# Altium PCB PCB1.PcbDoc (part 1 of 2)
Units mil, origin at the board's own origin, x right, y up, seen from the top; angles counter-clockwise.
Board outline 3308.29 x 3227.82 mil, 2 copper layers (Top Layer, Bottom Layer); 105 components, 80 nets, 433 pads, 304 vias.
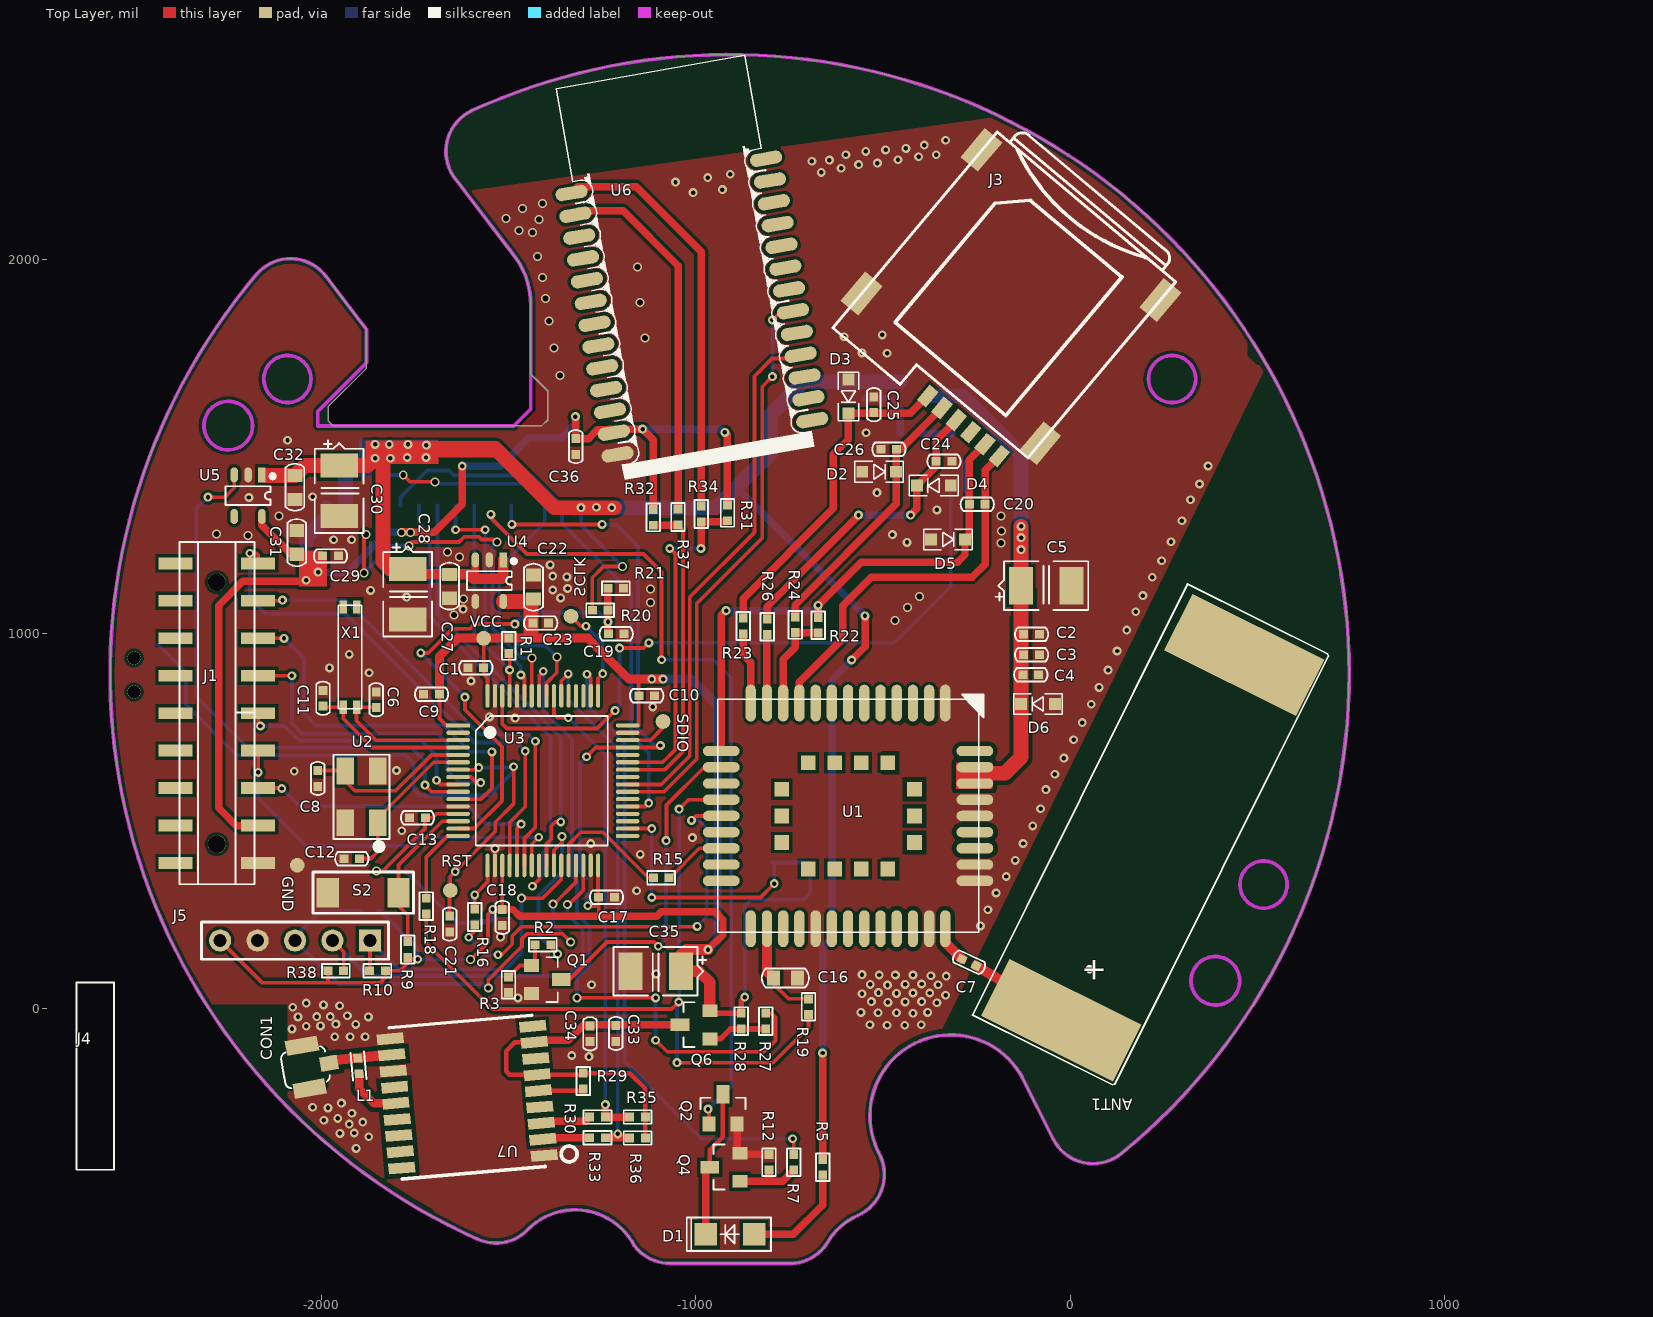
[diagram p0: Top Layer view]
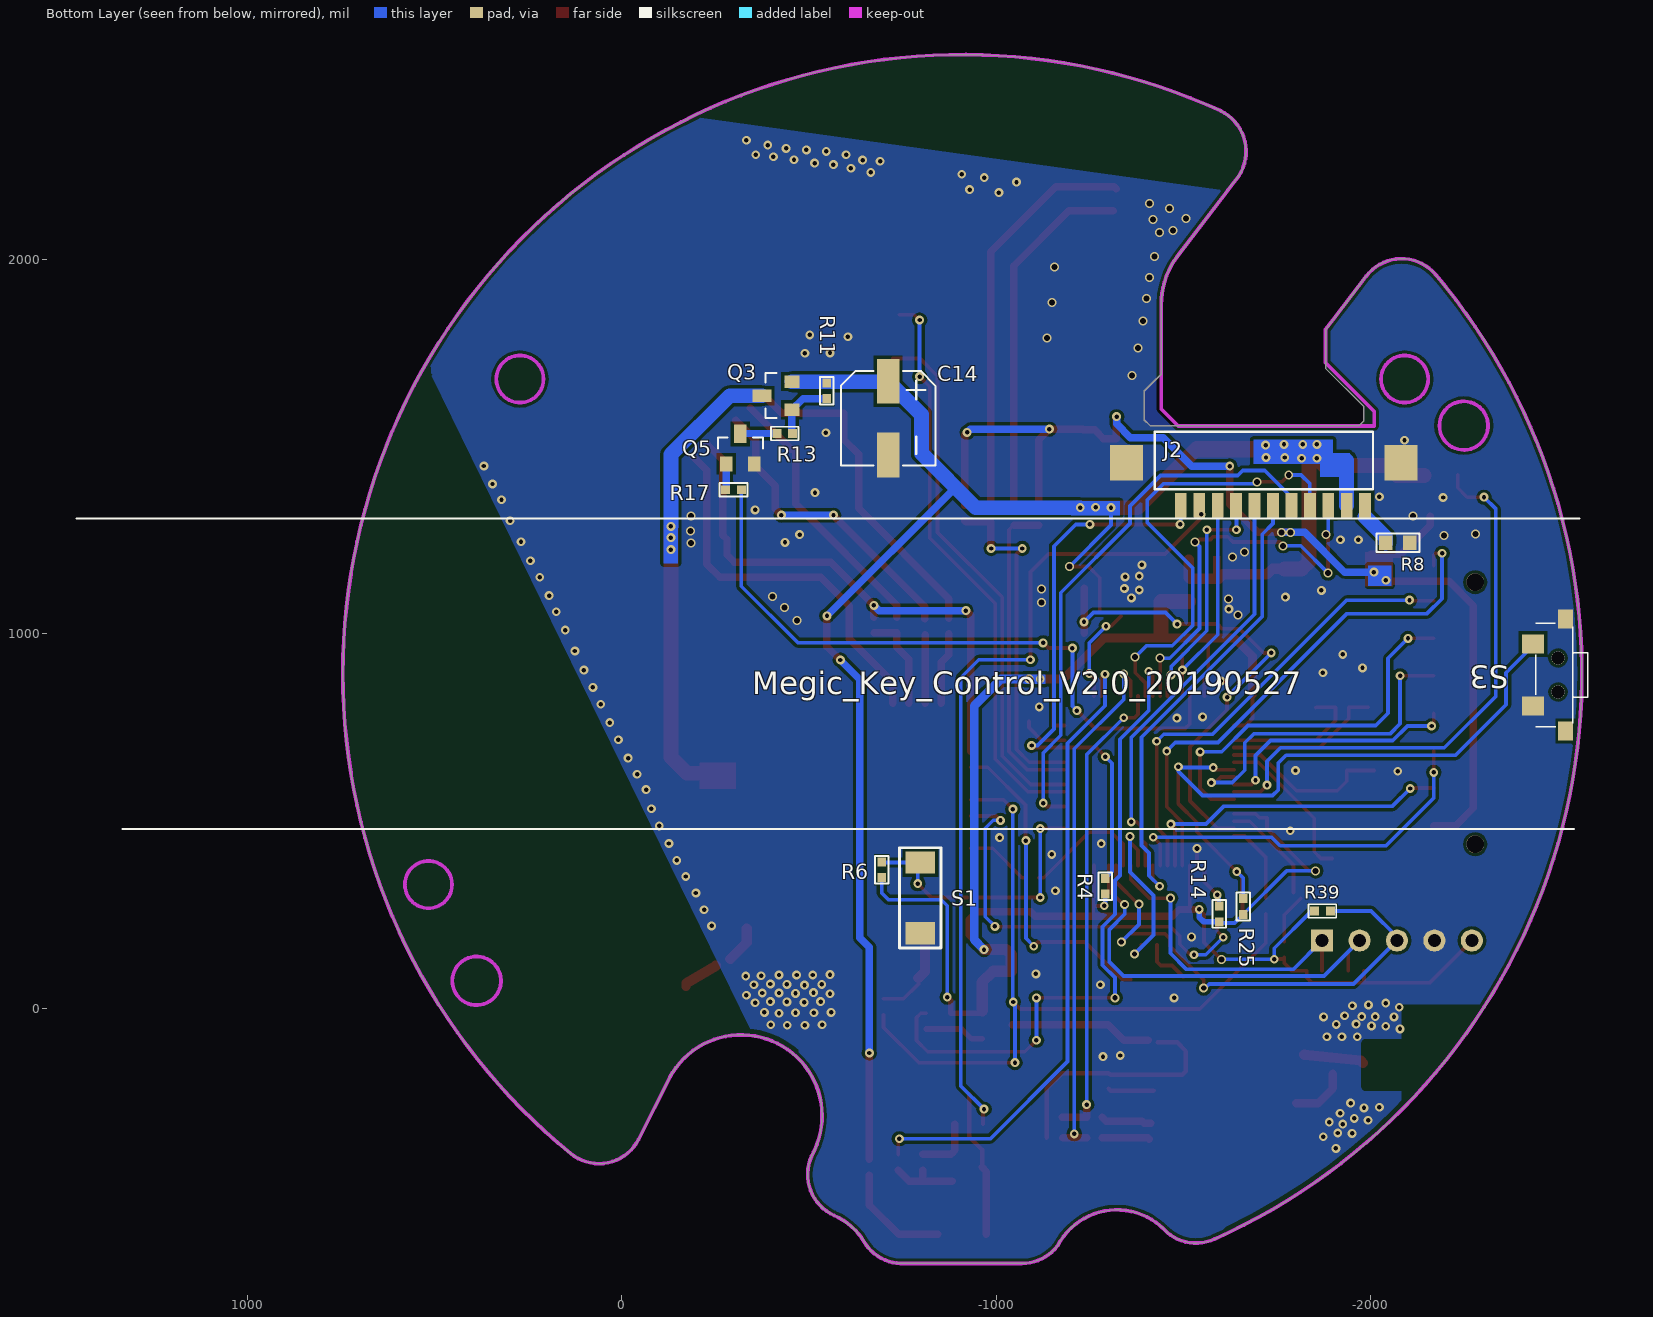
[diagram p1: Bottom Layer view, seen from below]

## Layer stack, top to bottom
Top Solder: solder mask 0.4, Solder Resist, Dk 3.5
Top Layer: signal copper 1.4
Dielectric 1: dielectric 12.6, FR-4, Dk 4.8
Bottom Layer: signal copper 1.4
Bottom Solder: solder mask 0.4, Solder Resist, Dk 3.5

## Board outline
-1981.78,1568.82 -1981.78,1606.22 -1879.42,1708.58 -1879.42,1812.91 -1899.1,1838.5 -1950.28,1905.43 -1984.14,1950.9 -1987.68,1955.63 -1987.64,1955.57 ccw(c-2081.79,1883.06) -2172.69,1959.61 -2172.6,1959.71 ccw(c-915.52,893.62) -2172.6,-172.46 -2173.33,-171.61 ccw(c-911.19,891.21) -1582.32,-616.16 -1582.13,-616.24 ccw(c-1533.15,-509.76) -1448.27,-590.59 -1448.31,-590.62 cw(c-1382.86,-650.18) -1436.48,-579.79 -1436.5,-579.8 -1426.66,-571.93 -1426.76,-572 cw(c-1322.08,-716.6) -1163.88,-633.9 -1163.83,-633.98 ccw(c-1068.12,-560.54) -1068.33,-681.18 -1068.39,-681.18 -744.57,-681.18 -744.5,-681.18 ccw(c-748.17,-564.35) -647.05,-622.97 -647.13,-623.1 cw(c-495.55,-715.62) -567.5,-553.27 -567.33,-553.2 ccw(c-616.59,-443.6) -512.32,-383.88 -512.29,-383.94 -518.19,-371.14 -521.15,-363.27 -521.12,-363.35 cw(c-318.62,-287.23) -128.5,-184.01 -128.43,-184.13 -44.77,-350.47 -44.82,-350.38 ccw(c60.99,-295.54) 136.31,-387.89 136.02,-388.13 ccw(c-909.34,893.62) 136.02,2175.37 ccw(c-909.59,888.75) -1599.74,2396.19 -1598.95,2396.55 ccw(c-1546.53,2288.12) -1633.31,2204.6 -1633.35,2204.65 -1622.53,2189.88 -1618.59,2184.96 -1484.67,2009.32 -1484.61,2009.25 cw(c-1656.39,1878.38) -1440.44,1878.38 -1440.44,1692.83 -1395.16,1647.56 -1395.16,1571.77 -1411.9,1555.04 -1968,1555.04

## Design rules (kind name [scope] priority, off if disabled: settings)
Clearance [All] p1: gap=8
ComponentClearance [All] p1 off: gap=10 collisioncheckmode=3 verticalgap=10 showdistances=FALSE
Height [All] p1 off: minheight=0 maxheight=1000 prefheight=500
HoleToHoleClearance [All] p1 off: gap=10 allowstackedmicrovias=TRUE
MinimumSolderMaskSliver [All] p1 off: minsoldermaskwidth=10
NetAntennae [All] p1 off: netantennaetolerance=0
PlaneConnect [All] p1: planeconnectstyle=Direct reliefexpansion=20 reliefentries=4 reliefconductorwidth=10 reliefairgap=10
PolygonConnect [All] p1: connectstyle=Direct reliefconductorwidth=10 reliefentries=4 polygonreliefangle="90 Angle" airgapwidth=10
RoutingVias [All] p1: holewidth=28 width=50 viastyle="Through Hole" minholewidth=28 minwidth=50 maxholewidth=28 maxwidth=50
SilkToSilkClearance [All] p1 off: silktosilkclearance=10
SilkToSolderMaskClearance [IsPad] p1 off: minsilkscreentomaskgap=10 clearancetoexposedcopper=TRUE
SolderMaskExpansion [All] p1: expansion=4
Width [All] p1: maxlimit=100 minlimit=1 preferedwidth=10 minimp=50.000000 maximp=50.000000 favimp=50.000000
22 further rules are at their usual default settings.

## Components (designator, comment, footprint, x,y, rotation, side; value= is the part's Value field where it differs from the comment)
ANT1 "PAD" L4G3210 -24,-32 r63.5 top
C1 "0.1uF" C0402 -1587.32,909.79 r180 top
C2 "0.1uF" C0402 -103.32,998.87 r180 top
C3 "100pF" C0402 -103.32,943.87 r180 top
C4 "22pF" C0402 -105.32,890.87 r180 top
C5 "220uF/6.3V" C1210-E -64.32,1128.87 r0 top
C6 "20pF" C0402 -1853.32,823.87 r270 top
C7 "100pF" C0402 -270.32,122.79 r155 top
C8 "20pF" C0402 -2009.32,613.79 r270 top
C9 "0.1uF" C0402 -1705.32,838.79 r180 top
C10 "0.1uF" C0402 -1131,835 r0 top
C11 "20pF" C0402 -1995.32,827.87 r270 top
C12 "20pF" C0402 -1918.32,399.79 r180 top
C13 "0.1uF" C0402 -1743,509 r180 top
C14 "330uF/6.3V" CAP6R3X5R6-SM -711.32,1575.87 r270 bottom
C16 "4.7uF" C0603 -728.32,80.87 r180 top
C17 "0.1uF" C0402 -1238.28,296.91 r0 top
C18 "0.1uF" C0402 -1516.32,242.79 r270 top
C19 "2uF" C0402 -1212.32,999.87 r0 top
C20 "0.1uF" C0402 -248.32,1345.87 r180 top
C21 "1uF" C0402 -1657.28,224.91 r270 top
C22 "10uF" C0603 -1433.28,1156.91 r270 top
C23 "0.1uF" C0402 -1414,1029 r180 top
C24 "22pF" C0402 -337.32,1460.87 r180 top
C25 "22pF" C0402 -524.32,1611.87 r270 top
C26 "22pF" C0402 -484.32,1492.87 r0 top
C27 "2.2uF" C0603 -1657.32,1094.87 r90 top
C28 "220uF/6.3V" C1210-E -1769.32,1105.79 r270 top
C29 "0.1uF" C0402 -1975.28,1207.91 r180 top
C30 "220uF/6.3V" C1210-E -1952.32,1381.79 r270 top
C31 "10uF" C0603 -2065.28,1275.91 r270 top
C32 "2.2uF" C0603 -2070.32,1358.87 r90 top
C33 "22pF" C0402 -1213.32,-67.13 r270 top
C34 "1uF" C0402 -1282.32,-68.13 r90 top
C35 "220uF/6.3V" C1210-E -1107.32,98.79 r180 top
C36 "0.1uF" C0402 -1320.32,1499.87 r270 top
CON1 "SMA/UFLR" IPX_U.FL -2041.32,-157.21 r10 top
D1 "LED/0603" D1206 -908.84,-603.43 r180 top
D2 "ESDLC5V0D3" SOD-323 -510.32,1432.87 r0 top
D3 "ESDLC5V0D3" SOD-323 -592.32,1633.87 r270 top
D4 "ESDLC5V0D3" SOD-323 -364.32,1395.87 r180 top
D5 "ESDLC5V0D3" SOD-323 -326.32,1251.87 r0 top
D6 "ESDLC5V0D3" SOD-323 -86.32,812.87 r180 top
J1 "CON2X9" OLED_2X9SMT -2228.64,788.07 r90 top
J2 "CON12" CON_12WT -1714.32,1342.79 r0 bottom
J3 "MICRO_SIM" MICRO_SIM -80.32,1508.79 r50 top
J4 "CON5" SIP1X5-2R54 -2603.28,-331.09 r90 top
J5 "CON5" HDR1X5 -1870,181 r180 top
L1 "47nH" L0402 -1902.32,-134.13 r275 top
Q1 "S8050" SOT23 -1399,77 r270 top
Q2 "S8050" SOT23 -927.32,-269.21 r0 top
Q3 "SI2305" SOT23 -414.32,1635.87 r90 bottom
Q4 "S0805" SOT23 -922.32,-424.21 r90 top
Q5 "S8050" SOT23 -316.32,1493.87 r180 bottom
Q6 "SI2305" SOT23 -1002.32,-44.21 r90 top
R1 "10K" R0402 -1499.32,987.87 r270 top
R2 "4.7K" R0402 -1388,170 r180 top
R3 "47K" R0402 -1500,83 r270 top
R4 "100K" R0402 -1291.32,305.87 r90 bottom
R5 "330R" R0402 -661.32,-404.21 r270 top
R6 "270K" R0402 -694.32,389.87 r270 bottom
R7 "4.7K" R0402 -738.32,-391.21 r270 top
R8 "0R" R0603 -2040,1243 r180 bottom
R9 "270K" R0402 -1769,177 r270 top
R10 "22K" R0402 -1870,100 r0 top
R11 "100K" R0402 -547.32,1668.87 r270 bottom
R12 "47K" R0402 -804.32,-431.21 r90 top
R13 "10K" R0402 -415.32,1534.87 r180 bottom
R14 "22K" R0402 -1595,232 r90 bottom
R15 "1K" R0402 -1112.32,348.87 r0 top
R16 "1K" R0402 -1590.32,263.87 r270 top
R17 "1K" R0402 -278.32,1384.87 r180 bottom
R18 "1K" R0402 -1719.28,292.91 r270 top
R19 "2M" R0402 -699,24 r270 top
R20 "2M" R0402 -1275.32,1062.87 r0 top
R21 "1M" R0402 -1233.32,1121.87 r0 top
R22 "10K" R0402 -673.32,1042.87 r270 top
R23 "22R" R0402 -873.32,1040.87 r270 top
R24 "22R" R0402 -734.32,1043.87 r270 top
R25 "10k" R0402 -1659.28,251.91 r90 bottom
R26 "22R" R0402 -809.32,1038.87 r270 top
R27 "10K" R0402 -813.32,-14.13 r270 top
R28 "100K" R0402 -878.32,-14.13 r270 top
R29 "1K" R0402 -1300.32,-214.13 r90 top
R30 "22R" R0402 -1282.32,-290.21 r0 top
R31 "22K" R0402 -915.32,1342.87 r270 top
R32 "22K" R0402 -1113.32,1330.87 r270 top
R33 "22R" R0402 -1282.32,-345.21 r0 top
R34 "22R" R0402 -985.32,1299.87 r90 top
R35 "22K" R0402 -1135.32,-290.21 r180 top
R36 "22K" R0402 -1135.32,-346.21 r180 top
R37 "22R" R0402 -1047.32,1291.87 r90 top
R38 "22K" R0402 -1941,100 r180 top
R39 "22K" R0402 -1891,260 r0 bottom
S1 "XXW-2548" XXW-2548 -797.32,294.87 r270 bottom
S2 "XXW-2548" XXW-2548 -1888,309 r180 top
S3 "SW_3X6X5" SW3X6X3R5 -2500,890 r90 bottom
U1 "BC28" BC28 -593.32,513.79 r270 top
U2 "8.000MHz" XTAL4-5X3R2 -1892.32,564.79 r90 top
U3 "STM32L071RBT6" QFP64-0R5 -1408.32,607.79 r270 top
U4 "TPS78233DDCR" SOT23-5 -1551.28,1141.91 r180 top
U5 "XC6209B332MR" SOT23-5 -2195.32,1368.87 r180 top
U6 "HC-42" BLEMODE -1010.32,1873.79 r100 top
U7 "ATGM336H-5N" ATGM336 -1437.32,-22.21 r185 top
X1 "32.768KHz" X_MC146 -1923.32,937.87 r90 top

## Footprints (in the part's own frame and the unit in brackets; to place one, negate y for a bottom-side part, rotate by r counter-clockwise, add the part's x,y. Pads: shape width x height; smd on the part's side, far side on the other; paste and mask are expansions set on the pad)
ATGM336 [mm]
  rect 1.8x0.75 smd: 1(0,9.45) 2(0,8.35) 3(0,7.25) 4(0,6.15) 5(0,5.05) 6(0,3.95) 7(0,2.85) 8(0,1.75) 9(0,0.65) 10(9.7,0.65) 11(9.7,1.75) 12(9.7,2.85) 13(9.7,3.95) 14(9.7,5.05) 15(9.7,6.15) 16(9.7,7.25) 17(9.7,8.35) 18(9.7,9.45)
  silkscreen extent -2.24,-0.1 9.7,10.2
BC28 [mm]
  oval 2.5x0.7 smd mask+0.05: 1(-7.65,6.6) 2(-7.65,5.5) 3(-7.65,4.4) 4(-7.65,3.3) 5(-7.65,2.2) 6(-7.65,1.1) 7(-7.65,0) 8(-7.65,-1.1) 9(-7.65,-2.2) 10(-7.65,-3.3) 11(-7.65,-4.4) 12(-7.65,-5.5) 13(-7.65,-6.6) 23(7.65,-6.6) 24(7.65,-5.5) 25(7.65,-4.4) 26(7.65,-3.3) 27(7.65,-2.2) 28(7.65,-1.1) 29(7.65,0) 30(7.65,1.1) 31(7.65,2.2) 32(7.65,3.3) 33(7.65,4.4) 34(7.65,5.5) 35(7.65,6.6)
  oval 0.7x2.5 smd mask+0.05: 14(-4.4,-8.6) 15(-3.3,-8.6) 16(-2.2,-8.6) 17(-1.1,-8.6) 18(0,-8.6) 19(1.1,-8.6) 20(2.2,-8.6) 21(3.3,-8.6) 22(4.4,-8.6) 36(4.4,8.6) 37(3.3,8.6) 38(2.2,8.6) 39(1.1,8.6) 40(0,8.6) 41(-1.1,8.6) 42(-2.2,8.6) 43(-3.3,8.6) 44(-4.4,8.6)
  rect 1x1 smd mask+0.05: 45(-3.6,2.7) 46(-3.6,0.9) 47(-3.6,-0.9) 48(-3.6,-2.7) 49(-1.8,-4.5) 50(0,-4.5) 51(1.8,-4.5) 52(3.6,-2.7) 53(3.6,-0.9) 54(3.6,0.9) 55(3.6,2.7) 56(1.8,4.5) 57(0,4.5) 58(-1.8,4.5)
  silkscreen extent -8.25,-8.85 7.9,9.2
BLEMODE [mm]
  oval 0.9x2.2 smd: 1(9,6.7) 2(7.5,6.7) 3(6,6.7) 4(4.5,6.7) 5(3,6.7) 6(1.5,6.7) 7(0,6.7) 8(-1.5,6.7) 9(-3,6.7) 10(-4.5,6.7) 11(-6,6.7) 12(-7.5,6.7) 13(-9,6.7) 14(-9,-6.7) 15(-7.5,-6.7) 16(-6,-6.7) 17(-4.5,-6.7) 18(-3,-6.7) 19(-1.5,-6.7) 20(0,-6.7) 21(1.5,-6.7) 22(3,-6.7) 23(4.5,-6.7) 24(6,-6.7) 25(7.5,-6.7) 26(9,-6.7)
  silkscreen extent -10.75,-6.5 16.15,6.5
C0402 [mil]
  rect 24x23 smd: 1(-21,0) 2(21,0)
  silkscreen extent -44,-18 44,18
C0603 [mm]
  rect 0.9x1 smd: 1(0,0) 2(1.62,0)
  silkscreen extent -0.77,-0.64 2.42,0.64
C1210-E [mil]
  rect 64x100 smd: 1(-67.5,0) 2(67.5,0)
  silkscreen extent -135,-65 112,65
CAP6R3X5R6-SM [mil]
  rect 120x60 smd: 1(-98.43,0) 2(98.43,0)
  silkscreen extent -126,-126 126,126
CON_12WT [mm]
  rect 0.8x1.7 smd: 1(-6.875,0) 2(-5.625,0) 3(-4.375,0) 4(-3.125,0) 5(-1.875,0) 6(-0.625,0) 7(0.625,0) 8(1.875,0) 9(3.125,0) 10(4.375,0) 11(5.625,0)
  rect 0.8x1.7 on Bottom Overlay: 12(6.875,0)
  rect 2.25x2.4 smd: 13(9.3,-2.9) 14(-9.3,-2.9)
  silkscreen extent -7.4,-5 7.4,-1.1
D1206 [mil]
  rect 60x60 smd: 1(-65,0) 2(65,0)
  silkscreen extent -110,-45 115,45
HDR1X5 [mm] "Connector; Header; 5 Position"
  rect 1.5x1.5 hole 0.9: 1(0,0)
  round 1.5 hole 0.9: 2(2.54,0) 3(5.08,0) 4(7.62,0) 5(10.16,0)
  silkscreen extent -1.27,-1.27 11.43,1.27
IPX_U.FL [mm]
  rect 1.2x1 smd: 1(1.6,0)
  rect 2.2x1.05 smd: 2(0,-1.475) 3(0,1.475)
  silkscreen extent -1.55,-1.24 1.51,1.23
L4G3210 [mm]
  rect 4.3x10 smd: 0(27.711,-0.051) 1(0,0)
  silkscreen extent -2.36,-5.18 30.3,5.54
L0402 [mil]
  rect 24x23 smd: 1(-1,0) 2(41,0)
  silkscreen extent -17,-18 57,18
MICRO_SIM [mm]
  rect 2.6x1.55 smd: 1(0,0) 2(0,15.8) 7(12.68,0) 8(12.68,15.85)
  rect 1.35x0.8 smd: C1(-2.45,2.83) C2(-2.45,5.37) C3(-2.45,7.91) C5(-2.45,1.56) C6(-2.45,4.1) C7(-2.45,6.64)
  silkscreen extent -3.05,0 15.51,15.8
OLED_2X9SMT [mm]
  rect 0.8x2.3 smd: 1(-10.16,-1.53) 2(-10.16,4.07) 3(-7.62,-1.53) 4(-7.62,4.07) 5(-5.08,-1.53) 6(-5.08,4.07) 7(-2.54,-1.53) 8(-2.54,4.07) 9(0,-1.53) 10(0,4.07) 11(2.54,-1.53) 12(2.54,4.07) 13(5.08,-1.53) 14(5.08,4.07) 15(7.62,-1.53) 16(7.62,4.07) 17(10.16,-1.53) 18(10.16,4.07)
  round 1.2 hole 1.2 unplated: 19(-8.89,1.27) 20(8.89,1.27)
  silkscreen extent -11.6,-1.27 11.6,3.81
QFP64-0R5 [mm]
  rect 0.28x1.6 smd: 1(-3.75,-5.75)
  oval 0.28x1.6 smd: 2(-3.25,-5.75) 3(-2.75,-5.75) 4(-2.25,-5.75) 5(-1.75,-5.75) 6(-1.25,-5.75) 7(-0.75,-5.75) 8(-0.25,-5.75) 9(0.25,-5.75) 10(0.75,-5.75) 11(1.25,-5.75) 12(1.75,-5.75) 13(2.25,-5.75) 14(2.75,-5.75) 15(3.25,-5.75) 16(3.75,-5.75) 33(3.75,5.75) 34(3.25,5.75) 35(2.75,5.75) 36(2.25,5.75) 37(1.75,5.75) 38(1.25,5.75) 39(0.75,5.75) 40(0.25,5.75) 41(-0.25,5.75) 42(-0.75,5.75) 43(-1.25,5.75) 44(-1.75,5.75) 45(-2.25,5.75) 46(-2.75,5.75) 47(-3.25,5.75) 48(-3.75,5.75)
  oval 1.6x0.28 smd: 17(5.75,-3.75) 18(5.75,-3.25) 19(5.75,-2.75) 20(5.75,-2.25) 21(5.75,-1.75) 22(5.75,-1.25) 23(5.75,-0.75) 24(5.75,-0.25) 25(5.75,0.25) 26(5.75,0.75) 27(5.75,1.25) 28(5.75,1.75) 29(5.75,2.25) 30(5.75,2.75) 31(5.75,3.25) 32(5.75,3.75) 49(-5.75,3.75) 50(-5.75,3.25) 51(-5.75,2.75) 52(-5.75,2.25) 53(-5.75,1.75) 54(-5.75,1.25) 55(-5.75,0.75) 56(-5.75,0.25) 57(-5.75,-0.25) 58(-5.75,-0.75) 59(-5.75,-1.25) 60(-5.75,-1.75) 61(-5.75,-2.25) 62(-5.75,-2.75) 63(-5.75,-3.25) 64(-5.75,-3.75)
  silkscreen extent -4.4,-4.55 4.4,4.4
R0402 [mil]
  rect 24x23 smd: 1(-1,0) 2(41,0)
  silkscreen extent -17,-18 57,18
R0603 [mm]
  rect 0.9x1 smd: 1(0,0) 2(1.62,0)
  silkscreen extent -0.64,-0.64 2.29,0.64
SIP1X5-2R54 [mm]
  round 1 smd: 1(18.112,-13.698) 2(16.408,-24.079) 3(33.501,-26.339) 4(27.864,-38.506) 5(35.003,-32.265)
  silkscreen extent -2.54,-1.27 10.16,1.27
SOD-323 [mm]
  rrect0% 0.8x0.8 smd: 1(-1.15,0) 2(1.15,0)
  silkscreen extent -1.65,-0.7 1.65,0.7
SOT23 [mil]
  rect 34x40 smd: 1(-37.5,-40) 2(37.5,-40)
  rect 34x50 smd: 3(0,40)
  silkscreen extent -60,0 61,31
SOT23-5 [mil]
  rect 20x40 smd: 1(-37,-55.5)
  oval 20x40 smd: 2(0,-55.5) 3(37,-55.5) 4(37,55.5) 5(-37,55.5)
  silkscreen extent -74,-60 60,25
SW3X6X3R5 [mm]
  rect 1.3x1.5 smd: 1(-2.1,1.7) 2(2.1,1.7)
  rect 1.3x1 smd: 3(3.8,-0.5) 4(-3.8,-0.5)
  round 0.9 hole 0.9 unplated: 5(-1.15,0) 6(1.15,0)
  silkscreen extent -3.5,-2 3.52,1.51
X_MC146 [mm]
  rect 0.9x0.5 smd: 1(-3.4,0.45) 2(-3.4,-0.45) 3(3.4,0.45) 4(3.4,-0.45)
  silkscreen extent -3.5,-0.8 3.5,0.8
XTAL4-5X3R2 [mm]
  rect 1.8x1.2 smd: 1(-1.75,-1.1) 2(1.75,-1.1) 3(1.75,1.1) 4(-1.75,1.1)
  silkscreen extent -3.69,-1.9 2.85,1.9
XXW-2548 [mm]
  rect 1.5x2 smd: 1(-2.4,0) 2(2.4,0)
  silkscreen extent -3.4,-1.4 3.4,1.4

## Part data
C1 C2 C3 C4 C5 C6 C7 C8 C9 C10 C11 C12 C13 C14 C16 C17 C18 C19 C20 C21 C22 C23 C24 C25 C26 C27 C28 C29 C30 C31 C32 C33 C34 C35 C36: library part C
D2 D3 D4 D5 D6: library part TVS_0, "TVS  Vrwm=5V Vc=9.8V 2P SOD323 SMT"
L1: library part L
Q1 Q2 Q4 Q5: library part NPN-A
Q3 Q6: library part FDN338P
R1 R2 R3 R4 R5 R6 R7 R8 R9 R10 R11 R12 R13 R14 R15 R16 R17 R18 R19 R20 R21 R22 R23 R24 R25 R26 R27 R28 R29 R30 R31 R32 R33 R34 R35 R36 R37 R38 R39: library part R
U2: library part XTAL_3.2X2.5
U5: library part LP2980
X1: library part CRYSTAL2

## Via types
v1: diameter 23.62, hole 11.81, Top Layer to Bottom Layer, 251 vias
v2: diameter 24, hole 16, Top Layer to Bottom Layer, 43 vias
v3: diameter 24, hole 14, Top Layer to Bottom Layer, 10 vias

## Nets (pads, with @x,y where several pads share a name; then routed paths per layer and width w, separated by ;. In a path a pad name is that pad's centre, name@x,y a point inside that pad or via, vN(x,y) a via of type N, cw(c..) or ccw(c..) an arc to the next point about the centre after c; other vN are vias at no path point)
BAT_VOLT_DET: C19.1 R20.2 R21.1 U3.15 | length 1309.1
  Top Layer w10: v1(-1734.28,948.91) -1714.09,948.91 -1649.32,1013.68 -1603,1013.68 -1590.68,1026 v1(-1483,1026) ; U3.15@-1634.7,479.83 -1591.35,479.83 -1517.28,553.91 -1517.28,698.28 -1616.28,797.28 v1(-1616.28,830.91)
  Top Layer w20: C19.1@-1234.32,1000.87 v1(-1234.32,1031.87) R20.2@-1234.32,1062.87 R21.1@-1234.32,1121.87
  Bottom Layer w10: v1(-1734.28,948.91) v1(-1616.28,830.91) ; v1(-1483,1026) -1452,1057 -1259.45,1057 v1(-1234.32,1031.87)
BI: J2.6 U3.24 | length 1245.4
  Top Layer w10: v1(-1436.32,325.87) -1418.16,344.03 U3.24@-1418.16,381.41
  Bottom Layer w10: J2.6@-1738.93,1342.79 -1738.93,1294.56 -1710.32,1265.96 -1710.32,1045.87 -1388,723.55 -1388,435 -1408,415 -1408,354.19 v1(-1436.32,325.87)
BLE_LINK: U3.40 U6.17 | length 1421.1
  Top Layer w10: U3.40@-1181.94,597.94 -1092.24,597.94 -1016.28,673.91 -1016.28,1097.91 -843.32,1270.87 -843.32,1687.87 -796.13,1735.06 U6.17@-724.45,1735.06
BLE_LPIN: U3.39 U6.19 | length 1536.9
  Top Layer w10: U3.39@-1181.94,578.26 -1084.93,578.26 -997.28,665.91 -997.28,1080.91 -822.32,1255.87 -822.32,1659.87 v1(-795.32,1686.87) ; v1(-795.32,1837.87) -781.17,1852.02 U6.19@-740.89,1852.02
  Bottom Layer w10: v1(-795.32,1686.87) v1(-795.32,1837.87)
BLE_UART1_RX: R31.2 R34.1 U3.43 | length 909.1
  Top Layer w10: U3.43@-1181.94,657 -1088.19,657 -1054.28,690.91 -1054.28,1212.82 v1(-1069.32,1227.87)
  Top Layer w20: v1@-985.32,1228.87 R34.1@-985.32,1298.87 -918.32,1298.87 R31.2@-915.32,1301.87
  Bottom Layer w10: v1(-1069.32,1227.87) v1(-986.32,1227.87)
BLE_UART1_TX: R32.2 R37.1 U3.42 | length 843.4
  Top Layer w10: U3.42@-1181.94,637.31 -1082.42,637.31 -1034.28,685.46 -1034.28,1277.82 R37.1@-1047.32,1290.87
  Top Layer w20: R32.2@-1113.32,1289.87 R37.1@-1048.32,1289.87
CHANGE_SEAL_PB4: J2.4 U3.56 | length 1218.6
  Top Layer w10: v2(-1781,1424) -1763,1406 v2(-1696,1406) ; U3.56@-1398.48,834.17 -1398.48,868.52 -1371,896 v2(-1371,938)
  Bottom Layer w10: J2.4@-1837.35,1342.79 -1837.35,1400.65 -1814,1424 v2(-1781,1424) ; v2(-1696,1406) -1691,1401 -1447,1401 -1403,1357 -1403,1297 -1525,1175 -1525,1023 -1470,968 -1401,968 v2(-1371,938)
CHARGE_DET: J2.8 U3.59 | length 631.4
  Top Layer w10: v1(-1641.32,1277.87) v1(-1562.32,1277.87) ; v1(-1467,890) -1457.53,880.53 U3.59@-1457.53,834.17
  Bottom Layer w10: v1(-1641.32,1277.87) -1641.32,1341.97 J2.8@-1640.5,1342.79 ; v1(-1562.32,1277.87) -1562.32,1008.32 -1467,913 v1(-1467,890)
CHARGE_EMPTY: J2.9 R1.2 U3.61 | length 592.3
  Top Layer w10: R1.2@-1499.32,946.87 -1496.9,944.45 v1(-1496.9,903.29) U3.61@-1496.9,834.17
  Bottom Layer w10: J2.9@-1591.29,1342.79 -1591.29,997.67 v1(-1496.9,903.29)
CHARGE_LED: J2.10 Q2.1 | length 2184.1
  Top Layer w10: v1(-1547,1319) -1547,1309 -1450.81,1212.81 -1139.26,1212.81 -1091.32,1164.87 v1(-1091.32,930.87) ; v1(-967.32,-269.13) -964.82,-271.63 Q2.1@-964.82,-309.21
  Bottom Layer w10: v1(-1091.32,930.87) -953.23,930.87 -905.28,882.91 -905.28,-207.09 v1(-967.32,-269.13)
CS1: J1.13 U3.11 | length 1035.3
  Top Layer w10: J1.13@-2168.4,988.07 -2099.52,988.07 v1(-2099.32,987.87) ; U3.11@-1634.7,558.57 -1573.61,558.57 -1544.32,587.87 v1(-1544.32,684.87)
  Bottom Layer w10: v1(-2099.32,987.87) -2046.32,934.87 -2046.32,787.87 -2013.32,754.87 -1672.32,754.87 -1602.32,684.87 v1(-1544.32,684.87)
CS2: J1.17 U3.20 | length 1400.2
  Top Layer w10: v1(-2190.32,1214.96) -2172.32,1214.96 -2168.4,1211.04 J1.17@-2168.4,1188.07 J1.17@-2168.4,1181.79 ; U3.20@-1496.9,381.41 -1496.9,496.37 -1455.28,538 v1(-1455.28,686.91)
  Bottom Layer w10: v1(-2190.32,1214.96) -2190.32,1093.87 -2150.32,1053.87 -1936.32,1053.87 -1592.13,709.68 -1478.04,709.68 v1(-1455.28,686.91)
D/C: J1.11 U3.8 | length 896.4
  Top Layer w10: J1.11@-2168.4,888.07 -2078.52,888.07 v1(-2078.32,887.87) ; U3.8@-1634.7,617.63 -1600.08,617.63 -1585.32,602.87 v1(-1574.32,602.87)
  Bottom Layer w10: v1(-2078.32,887.87) -2078.32,759.87 -2051.32,732.87 -1687.32,732.87 -1663.32,708.87 -1663.32,635.87 -1630.32,602.87 v1(-1574.32,602.87)
DS1302_CLK: J5.3 R39.1 U3.29 | length 1342.5
  Top Layer w10: v3(-1554,54) -1554,76 -1464,166 -1464,185.91 -1450.91,199 -1356,199 v3(-1334,177) ; v3(-1381,278) -1379,278 -1319.74,337.26 U3.29@-1319.74,381.41
  Bottom Layer w10: R39.1@-1892,260 -2001,260 -2070,191 J5.3@-2070,181 -1954,65 -1569,65 v3@-1560,56 ; v3(-1381,278) -1381,224 v3(-1334,177)
DS1302_IO: J5.2 R38.1 U3.30 | length 1111
  Top Layer w10: J5.2@-1970,181 -1940,151 R38.1@-1940,100 ; v3(-1343,277) -1339,277 -1300.05,315.95 U3.30@-1300.05,381.41
  Bottom Layer w10: J5.2@-1970,181 -1875,86 -1340,86 -1302,124 -1302,210.54 -1343,251.54 v3(-1343,277)
DS1302_RST: J5.1 R10.1 U3.27 | length 826.8
  Top Layer w10: R10.1@-1870,100 J5.1@-1870,161 ; v3(-1465,294) -1409,294 -1359.11,343.89 U3.27@-1359.11,381.41
  Bottom Layer w10: J5.1@-1870,181 -1793,104 -1508,104 -1465,147 v3(-1465,294)
ELECTRIC_LIMIT_PB6: J2.3 U3.58 | length 1059.4
  Top Layer w10: v2(-1886,1162) v2@-1886,1266 ; v2(-1766,1235) -1756,1245 -1632,1245 -1618,1259 -1579,1259 -1572,1252 -1542,1252 -1535,1245 v2(-1531,1245) ; U3.58@-1437.85,834.17 v2(-1437.85,934.85)
  Bottom Layer w10: J2.3@-1886.56,1342.79 -1886.56,1270.56 v2(-1881,1265) ; v2(-1886,1162) -1813,1235 v2(-1766,1235) ; v2(-1531,1245) -1543,1233 -1543,1014.46 -1463.39,934.85 v2(-1437.85,934.85)
FI: J2.7 U3.25 | length 1122.3
  Top Layer w10: U3.25@-1398.48,381.41 -1398.48,438.88 -1386,451.36 -1386,487 -1375.13,497.87 v1(-1360.32,497.87)
  Bottom Layer w10: J2.7@-1689.71,1342.79 -1689.71,1052.26 -1360.32,722.87 v1(-1360.32,497.87)
FSO/SPI1_MISO: J1.15 U3.22 | length 1238.1
  Top Layer w10: J1.15@-2168.4,1088.07 v1@-2105.12,1088.07 ; U3.22@-1457.53,381.41 -1457.53,453.74 -1428.28,483 v1(-1428.28,712.91)
  Bottom Layer w10: v1(-2103.32,1089.87) -1935.32,1089.87 -1577.32,731.87 -1447.23,731.87 v1(-1428.28,712.91)
GND: C1.2 C2.1 C3.1 C4.1 C5.2 C6.1 C8.2 C9.2 C10.2 C11.1 C12.2 C13.2 C14.2 C16.1 C17.2 C18.2 C19.2 C21.2 C22.1 C23.1 C24.1 C25.1 C26.1 C27.1 C28.2 C29.1 C30.2 C31.1 C32.1 C33.2 C34.1 C35.2 C36.2 CON1.2 CON1.3 D2.1 D3.1 D4.1 D5.1 D6.1 J1.1 J2.13 J2.14 J3.1 J3.2 J3.7 J3.8 J4.1 J5.4 Q1.2 Q2.2 Q4.2 Q5.2 R3.2 R8.2 R12.2 R21.2 S1.2 S2.2 S3.1 S3.3 U1.1 U1.27 U1.34 U1.36 U1.37 U1.40 U1.41 U2.2 U2.4 U3.12 U3.18 U3.31 U3.47 U3.60 U3.63 U4.2 U4.4 U5.2 U6.13 U7.1 U7.10 U7.12 | length 205.8
  Top Layer w10: U3.18@-1536.27,381.41 -1536.27,426.73 v3(-1536,427)
  Top Layer w20: Q2.2@-889.82,-309.21 -889.82,-379.21 Q4.2@-882.32,-386.71 -878.82,-390.21 R12.2@-804.32,-390.21
  other v1: -1907,-374 -1873,-343 -1950,-334 -1912,-333 -1925,-309 -1889,-304 -1993,-299 -1956,-294 -1918,-280 -1982,-266 -2023,-264 -1946,-253 -1285,-129 -1331,-126 -1964,-76 -1923,-76 -1883,-76 -2078,-55 -2040,-48 -2002,-47 -489,-45 -442,-45 -535,-44 -398,-44 -1908,-43 -1961,-42 -2062,-23 -1874,-23 -2012,-22 -1976,-22 -1930,-20 -420,-13 -513,-12 -464,-12 -559,-11 -381,-11 -2076,3 -1951,7 -1994,9 -2040,14 -356,15 -487,16 -441,17 -531,18 -397,18 -1475,28 -333,35 -556,39 -464,40 -420,41 -375,41 -512,42 -488,62 -1278,63 -353,63 -534,64 -441,64 -397,65 -331,86 -372,87 -510,89 -467,89 -420,89 -556,90 -1106,92 -240,220 -220,263 -198,308 -1158,314 -171,352 -147,395 -1148,411 -1280.37,439.63 -126,440 -1009,456 -1785,474 -100,487 -79,533 -65,584 -41,625 -2072,633 -1799,635 -17,668 9,717 32,763 -1482.32,774.87 -1551,778 -1115,805 56,812 77,857 -1600,874 -1872,896 101,903 -1978,909 -1925,945 125,954 151,1010 175,1059 -1621,1066 -1361,1096 -1772,1098 194,1102 -1868,1116 -1382,1117 -1342,1121 219,1151 -1344,1152 -1382,1154 -1389,1184 244,1195 -436,1244 269,1246 -1967,1251 -1919,1251 -475,1265 298,1302 -356,1331 321,1358 -2193,1364 -2023,1366 -516,1377 345,1400 368,1448 -2090,1517 -545,1537 -489,1749 -556,1750 -604,1793 -502,1798 -1007,2178 -929,2186 -1054,2206 -968,2218 -908,2227 -665,2232 -612,2243 -565,2253 -515,2257 -690,2262 -643,2265 -460,2266 -405,2274 -599,2279 -358,2279 -546,2288 -493,2292 -439,2296 -390,2305 -333,2318
  other v2: -468,1036 -1645,1050 -434,1070 -1121,1083 -1620,1093 -403,1099 -1121,1120 -1631,1205 -1663,1218 -185,1242 -2195,1263 -2280,1267 -184,1275 -2113,1314 -185,1314 -1363,1690 -1378,1763 -1135,1790 -1392,1835 -1149,1884 -1401,1895 -1409,1951 -1156,1980 -1422,2008 -1436,2071 -1472,2077 -1419,2106 -1507,2109 -1463,2136 -1409,2149
  other v3: -1521,191
GPS_ON/OFF: R27.1 U3.57 | length 1767.4
  Top Layer w10: U3.57@-1418.16,834.17 -1418.16,887.03 -1407.32,897.87 v1(-1407.32,899.87) ; v3@-1317,27.91 v1(-1107.28,27.91) ; v1(-1107.32,-85.13) -1076.32,-116.13 -817.32,-116.13 -787.32,-86.13 -787.32,-24.13 -798.32,-13.13 R27.1@-813.32,-13.13
  Bottom Layer w10: v1(-1407.32,899.87) -1407.32,795.32 -1330.32,718.32 -1330.32,354.32 -1317,341 -1317,251 -1284,218 -1284,115 -1317,82 v3(-1317,28) ; v1(-1107.32,-85.13) v1@-1107.32,27.87
GPS_UART5_RX: R33.2 R36.2 U3.54 | length 1423.2
  Top Layer w10: U3.54@-1359.11,834.17 -1359.11,874.08 v1(-1340.32,892.87)
  Top Layer w20: R33.2@-1241.32,-345.21 v1@-1208.32,-345.21 ; v1(-1208.32,-335.13) v1@-1208.32,-345.21 ; R36.2@-1177.32,-345.21 v1@-1208.32,-345.21
  Bottom Layer w10: v1(-1340.32,892.87) -1340.32,824.87 -1208.32,692.87 v1(-1208.32,-335.13)
GPS_UART5_TX: R30.2 R35.2 U3.55 | length 1263.3
  Top Layer w10: U3.55@-1378.79,834.17 -1378.79,785.34 -1369.32,775.87 v1(-1340.32,775.87)
  Top Layer w20: v1(-1241.32,-257.13) R30.2@-1241.32,-290.21 R35.2@-1176.32,-290.21
  Bottom Layer w10: v1(-1340.32,775.87) -1241.32,676.87 v1(-1241.32,-257.13)
NB_ON/OFF: R17.2 U3.62 | length 1783.6
  Top Layer w10: U3.62@-1516.59,834.17 -1516.59,759.14 -1504.32,746.87 -1263.32,746.87 v1(-1215.28,794.91) ; v1(-1203.28,961.91) -1139.28,961.91 v1(-1125.28,975.91)
  Bottom Layer w10: v1(-1215.28,794.91) -1203.28,806.91 v1(-1203.28,961.91) ; v1(-1125.28,975.91) -470.28,975.91 -319.32,1126.87 R17.2@-319.32,1384.87
NB_RESET: R2.1 U3.26 | length 480.3
  Top Layer w10: R2.1@-1387,170 -1387,163 v3(-1369,145) ; U3.26@-1378.79,381.41 -1378.79,422.21 -1357.42,443.58 -1357.42,458.58 v3(-1357,459)
  Bottom Layer w10: v3(-1369,145) -1420,196 -1420,301 -1357,364 v3(-1357,459)
NB_RST: Q1.3 U1.15 | length 878.9
  Top Layer w10: Q1.3@-1359,77 -1337.19,77 -1237.28,176.91 -1111.28,176.91 v1(-1100.28,165.91) ; v1(-1079.28,447.91) -1078.28,448.91 -1078.28,542.91 -977.48,643.71 U1.15@-931.9,643.71
  Bottom Layer w10: v1(-1100.28,165.91) -1079.28,186.91 v1(-1079.28,447.91)
NB_UART2_RX: R14.2 R16.1 U3.17 | length 163.6
  Top Layer w10: R16.1@-1590.32,264.87 -1590.32,302.87 v1(-1590.28,302.91) -1555.96,337.23 U3.17@-1555.96,381.41
  Bottom Layer w10: R14.2@-1595,273 -1595,298.19 v1(-1590.28,302.91) v1@-1590.28,301.91
NB_UART2_TX: R18.1 U3.16 | length 217.9
  Top Layer w10: R18.1@-1719.28,293.91 -1719.28,403.91 -1663.04,460.15 U3.16@-1634.7,460.15
NetANT1_1: ANT1.1 C7.1 | length 99.5
  Top Layer w23.62: ANT1.1@-173.63,67.32 ANT1.1@-171.28,57.91
  Top Layer w27.56: C7.1@-250.65,113.53 ANT1.1@-173.63,67.32
NetC6_2: C6.2 U3.3 X1.2 | length 381.1
  Top Layer w10: C6.2@-1853.32,802.87 -1854.46,804.01 X1.2@-1905.6,804.01 -1905.6,768.07 -1853.59,716.05 U3.3@-1634.7,716.05
NetC7_2: C7.2 U1.35 | length 99.2
  Top Layer w27.56: U1.35@-333.48,212.61 -333.48,175.79 C7.2@-289.35,131.66
NetC8_1: C8.1 U2.3 U3.5 | length 452.9
  Top Layer w10: C8.1@-2009.32,634.79 -1936.73,634.79 U2.3@-1935.63,633.68 -1935.63,606.09 -1910.32,580.79 -1801.32,580.79 -1705.42,676.68 U3.5@-1634.7,676.68
NetC11_2: C11.2 U3.4 X1.1 | length 420.2
  Top Layer w10: C11.2@-1992.46,804.01 X1.1@-1941.04,804.01 -1941.04,789.93 -1941.04,773.5 -1863.9,696.37 U3.4@-1634.7,696.37
NetC12_1: C12.1 U2.1 U3.6 | length 421.6
  Top Layer w10: C12.1@-1897.32,399.79 -1867.32,399.79 -1849.01,418.09 U2.1@-1849.01,495.89 -1849.01,507.64 -1699.65,657 U3.6@-1634.7,657
NetC24_2: C24.2 D4.2 J3.C2 R26.1 | length 821.5
  Top Layer w20: R26.1@-809.32,1039.87 -809.32,1072.87 v1(-565.32,1316.87) ; v1(-426.32,1316.87) -409.6,1333.59 D4.2@-409.6,1395.87 -358.32,1447.14 C24.2@-358.32,1460.87 -358.32,1516.75 J3.C2@-304.28,1570.79
  Bottom Layer w20: v1(-565.32,1316.87) v1(-426.32,1316.87)
NetC25_2: C25.2 D3.2 J3.C3 R23.1 | length 893.8
  Top Layer w20: R23.1@-873.32,1041.87 -873.32,1093.87 -632.32,1334.87 -632.32,1478.87 -592.32,1518.87 D3.2@-592.32,1588.59 -427.36,1588.59 J3.C3@-380.88,1635.07
NetC26_2: C26.2 D2.2 J3.C7 R24.1 | length 714.5
  Top Layer w20: R24.1@-734.32,1044.87 -734.32,1076.87 -464.34,1346.84 C26.2@-464.34,1491.84 ; C26.2@-452.64,1492.87 J3.C7@-342.58,1602.93
NetCON1_1: CON1.1 L1.1 U7.11 | length 160.5
  Top Layer w26.4: CON1.1@-1979.29,-146.27 CON1.1@-1973.75,-139.48
  Top Layer w27.56: CON1.1@-1973.75,-139.48 U7.11@-1822.75,-124.13
NetD1_1: D1.1 R5.2 | length 294.9
  Top Layer w20: D1.1@-843.84,-603.43 -739.53,-603.43 -661.32,-525.21 R5.2@-661.32,-445.21
NetD1_2: D1.2 Q2.3 Q4.3 | length 393.5
  Top Layer w12: Q4.3@-962.32,-424.21 -962.32,-378.21 -927.32,-343.21 Q2.3@-927.32,-229.21
  Top Layer w20: D1.2@-973.84,-603.43 -973.84,-435.73 Q4.3@-962.32,-424.21
NetJ2_1: J2.1 R8.1 | length 122.6
  Bottom Layer w30: J2.1@-1984.99,1312.01 J2.1@-1984.99,1342.79
  Bottom Layer w40: R8.1@-2040,1243 -2040,1257 J2.1@-1984.99,1312.01
NetL1_2: L1.2 U7.14 | length 153.6
  Top Layer w22: L1.2@-1898.75,-174.98 -1898.75,-213.71 -1858.89,-253.56 U7.14@-1800.43,-253.56
NetQ1_1: Q1.1 R2.2 R3.1 | length 133.3
  Top Layer w10: R3.1@-1500,84 -1469.5,114.5 Q1.1@-1439,114.5 -1429,124.5 R2.2@-1429,170